# Altium PCB Slave_2_relays.PcbDoc
Units mm, origin at the board's own origin, x right, y up, seen from the top; angles counter-clockwise.
Board outline 89.28 x 72.52 mm, 2 copper layers (Top Layer, Bottom Layer); 42 components, 33 nets, 138 pads, 38 vias.
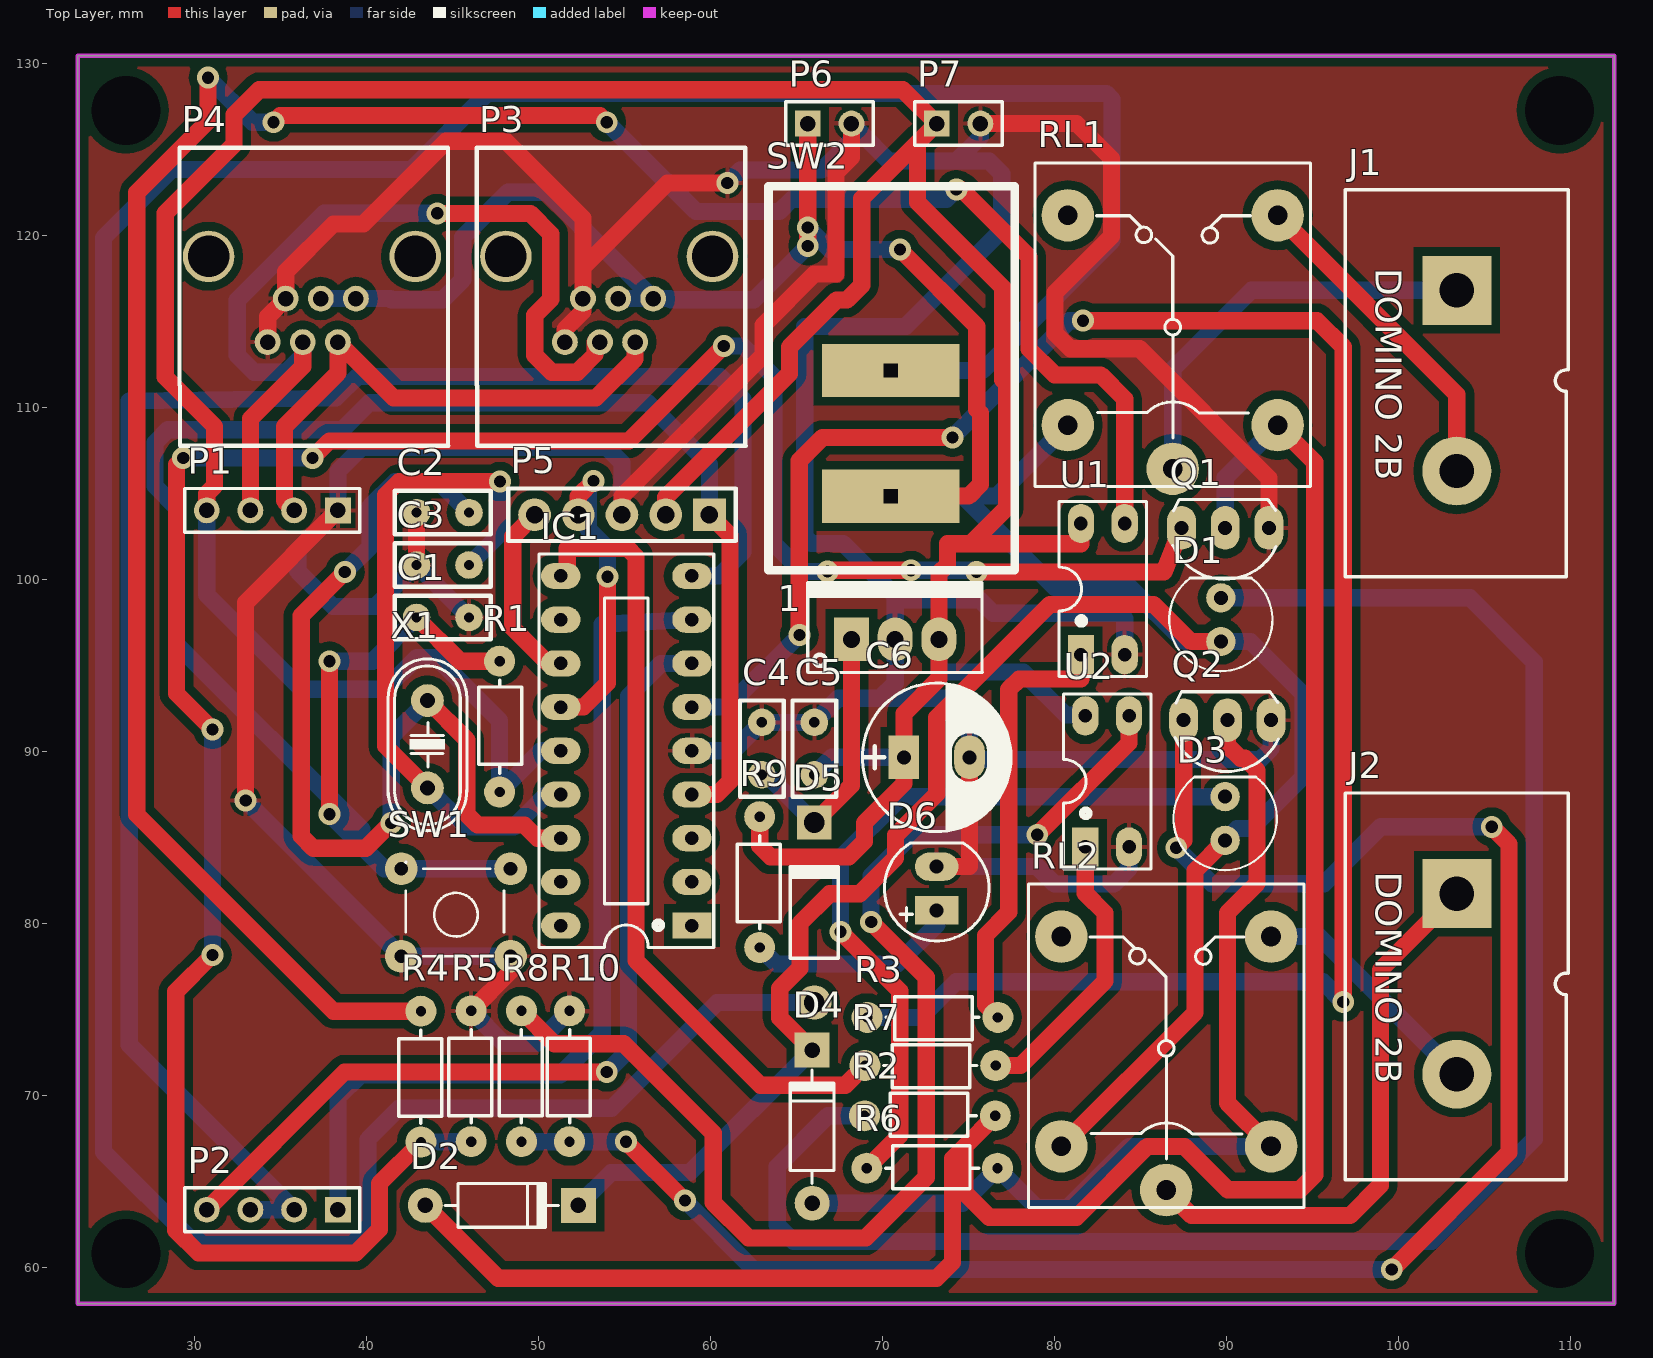
[diagram p0: Top Layer view]
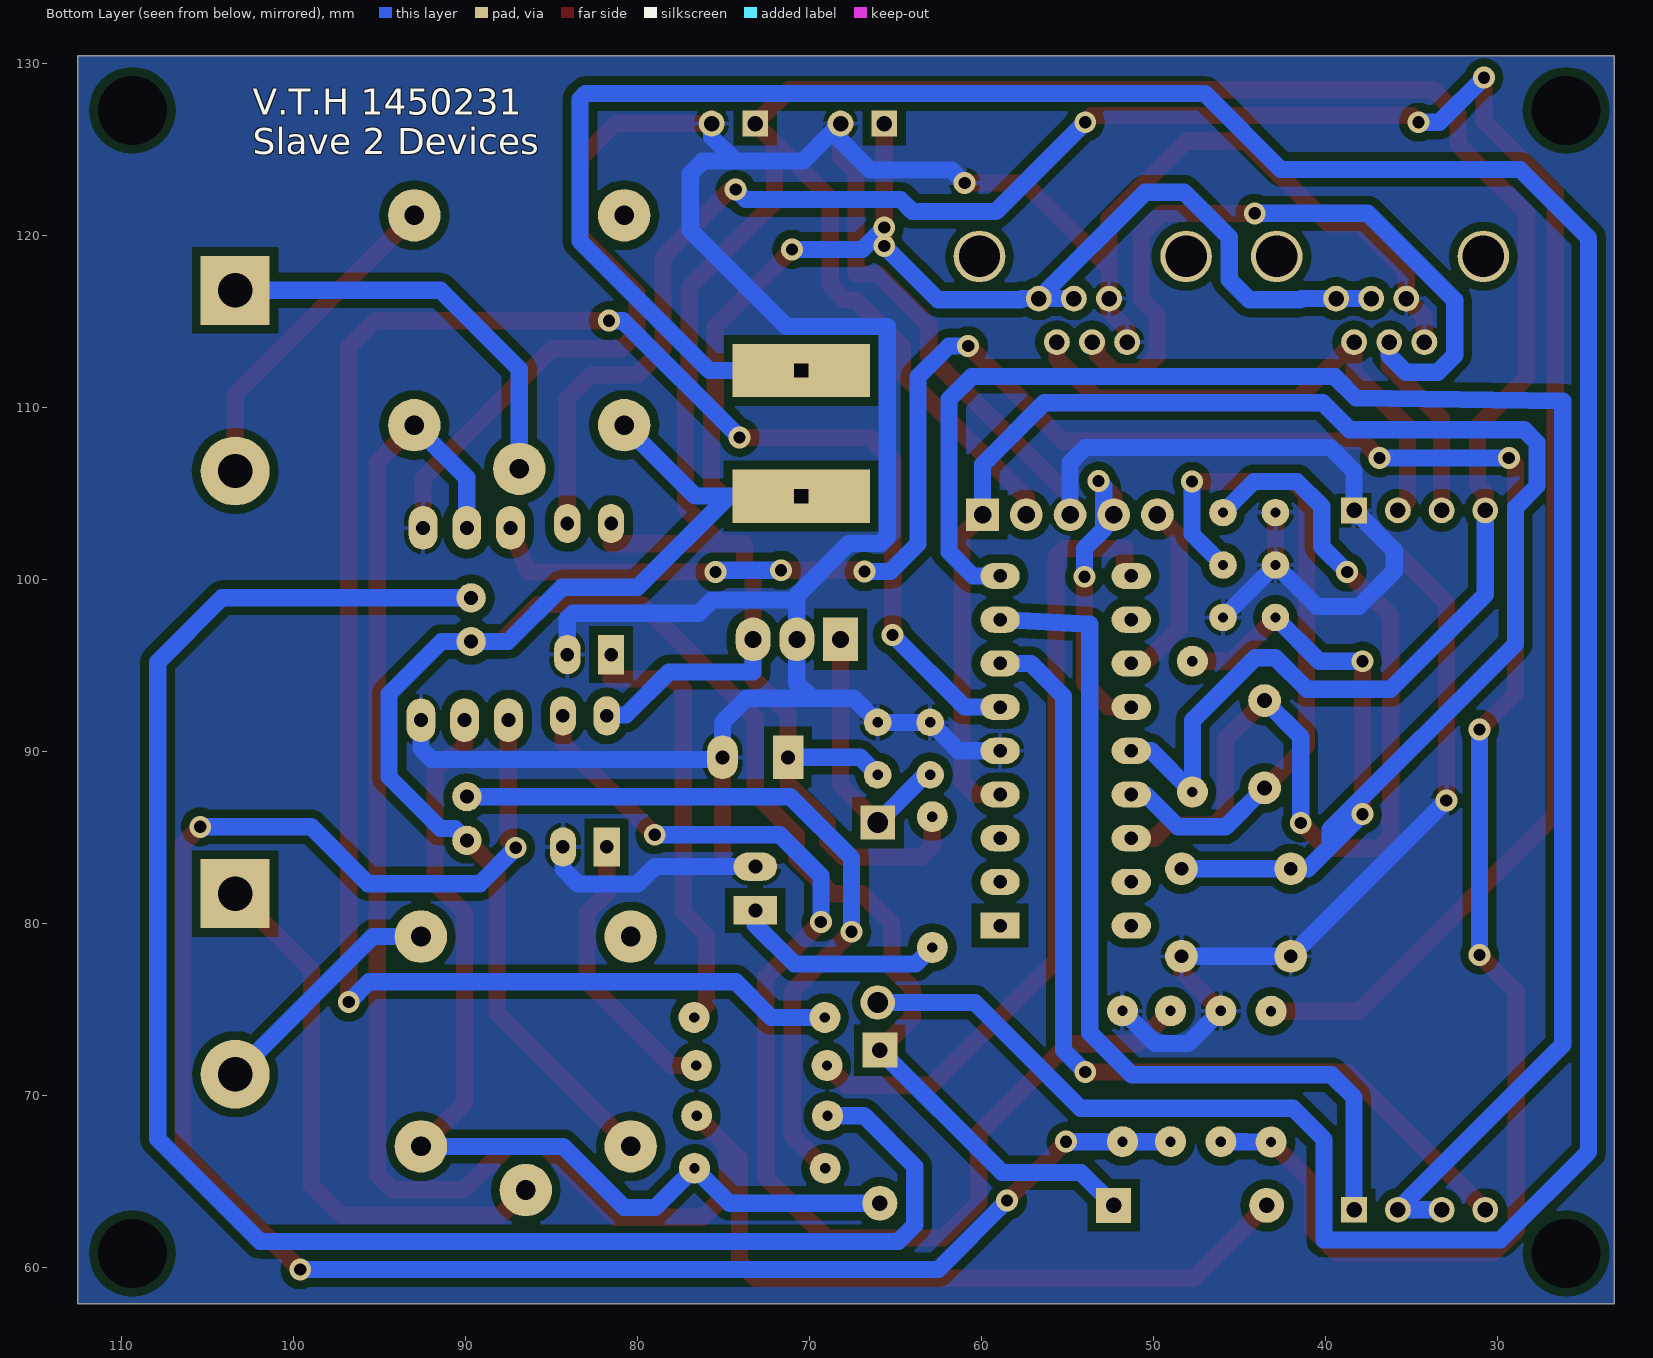
[diagram p1: Bottom Layer view, seen from below]
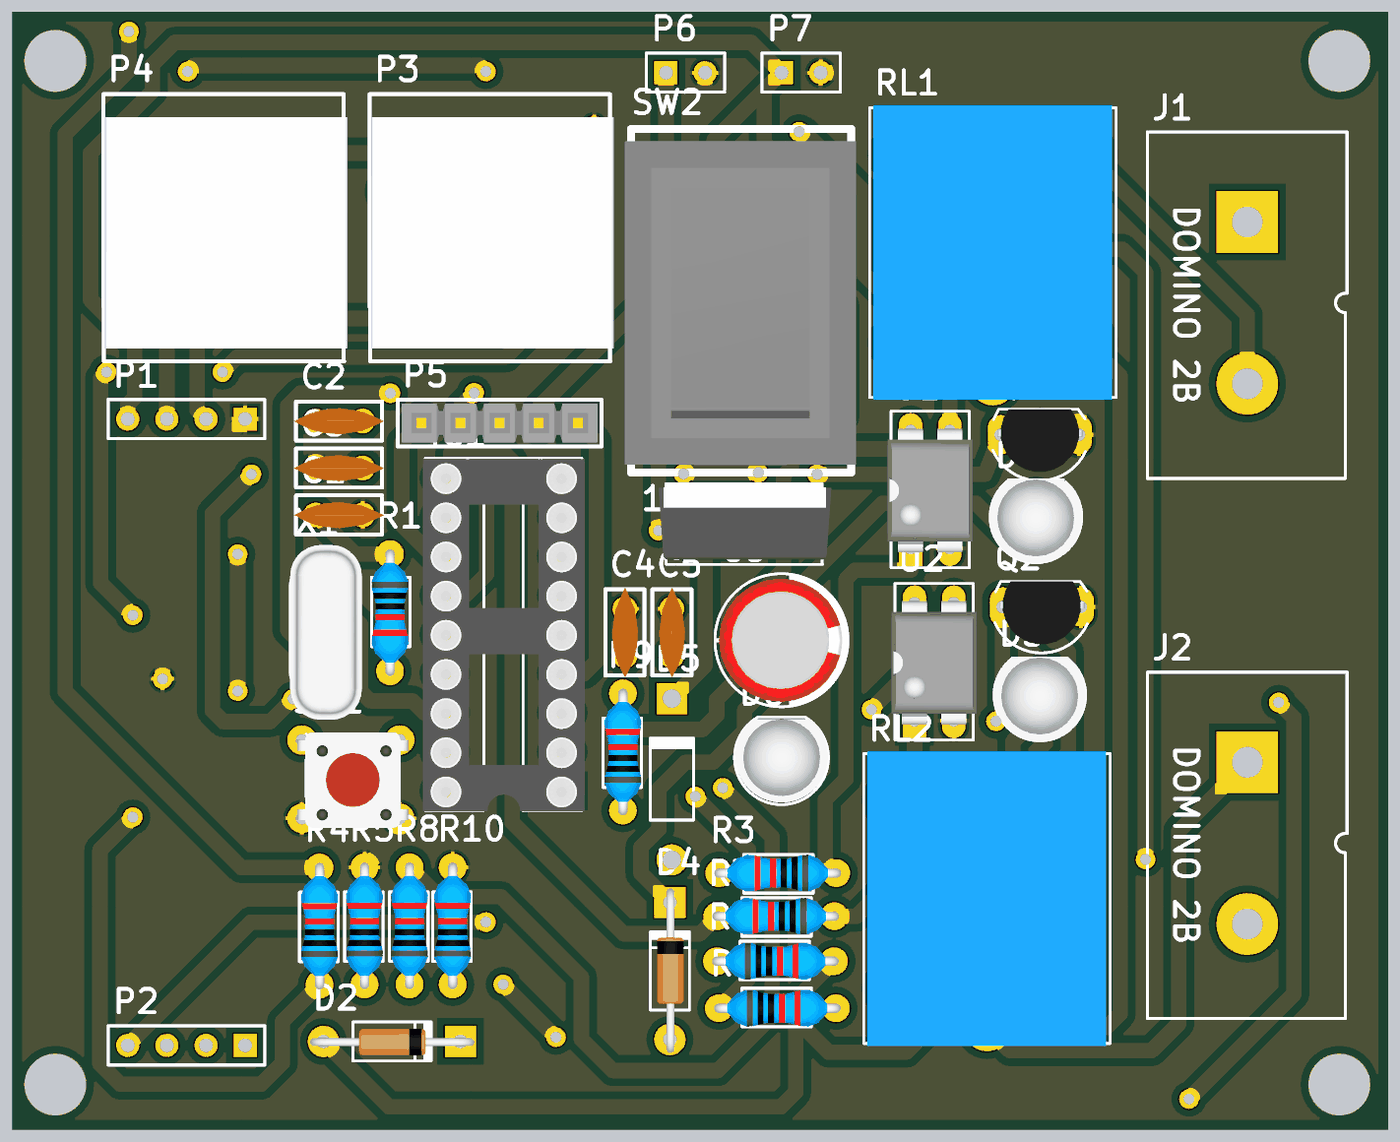
[diagram p2: 3D render of the assembled board from above, using the file's embedded part models]

## Layer stack, top to bottom
Top Solder: solder mask 0.0102, Solder Resist, Dk 3.5
Top Layer: signal copper 0.0356
Dielectric 1: dielectric 0.32, FR-4, Dk 4.8
Bottom Layer: signal copper 0.0356
Bottom Solder: solder mask 0.0102, Solder Resist, Dk 3.5

## Board outline
23.241,57.912 112.522,57.912 112.522,130.429 23.241,130.429

## Design rules (kind name [scope] priority, off if disabled: settings)
Clearance [All] p1: gap=0.5 ignorepadtopadclearanceinfootprint=FALSE
PolygonConnect [All] p1: connectstyle=Relief reliefconductorwidth=0.254 reliefentries=4 polygonreliefangle="90 Angle" airgapwidth=0.254
RoutingVias [All] p1: holewidth=0.711 width=1.27 viastyle="Through Hole" minholewidth=0.711 minwidth=1.27 maxholewidth=0.711 maxwidth=1.27
SolderMaskExpansion [All] p1: expansion=0.102
Width [All] p1: maxlimit=2 minlimit=0.5 preferedwidth=1
30 further rules are at their usual default settings.

## Components (designator, comment, footprint, x,y, rotation, side; value= is the part's Value field where it differs from the comment)
1 "L78M05CP" QTO-220 68.199,96.52 r0 top
C1 "Capacitor Ceramic" "Cap Non-Pol 3mm" 44.45,97.79 r180 top value=100n
C2 "Cap Non-pol" "Cap Non-Pol 3mm" 44.45,103.886 r180 top value=22p
C3 "Cap Non-pol" "Cap Non-Pol 3mm" 44.45,100.838 r180 top value=22p
C4 "Cap Non-pol" "Cap Non-Pol 3mm" 62.992,90.17 r270 top value=100n
C5 "Cap Non-pol" "Cap Non-Pol 3mm" 66.04,90.17 r270 top value=100n
C6 "100uF/16V" CP1.5/3.4 71.247,89.662 r0 top value=100uF/35V/50V
D1 "LED" "LED-0 5mm RED" 89.662,97.663 r180 top
D2 "1N4007" D1A 43.434,63.627 r180 top
D3 "LED" "LED-0 5mm RED" 89.916,86.106 r180 top
D4 "1N4007" D1A 65.913,63.754 r270 top
D5 "Diode 1N4007" DO-41 66.04,80.645 r90 top
D6 "LED" "LED-5mm RED" 73.152,80.772 r90 top
IC1 "PIC16F628A" DIP18/W0.3 58.928,79.883 r90 top
J1 "CON.Domino2" "DOMINO 2B" 103.378,116.799 r270 top
J2 "CON.Domino2" "DOMINO 2B" 103.378,81.747 r270 top
P1 "Header 4" HDR1X4 38.354,104.013 r180 top
P2 "Header 4" HDR1X4 38.354,63.373 r180 top
P3 "Header 8" RJ11 55.626,113.792 r180 top
P4 "Header 8" RJ11 38.354,113.792 r180 top
P5 "Header 5" "Header 5" 59.944,103.759 r180 top
P6 "Header 2" HDR1X2 65.659,126.492 r0 top
P7 "Header 2" HDR1X2 73.152,126.492 r0 top
Q1 "C1815" QTO-92 89.916,102.997 r180 top
Q2 "C1815" QTO-92 90.043,91.821 r180 top
R1 "RES_SMD_0805" "RESISTOR 1/4W" 47.752,95.25 r270 top value=10k
R2 "RES_SMD_0805" "RESISTOR 1/4W" 68.961,68.834 r0 top value=2k2
R3 "RES_SMD_0805" "RESISTOR 1/4W" 76.708,74.549 r180 top value=1k
R4 "RES_SMD_0805" "RESISTOR 1/4W" 43.18,67.31 r90 top value=560
R5 "RES_SMD_0805" "RESISTOR 1/4W" 46.101,67.33 r90 top value=560
R6 "RES_SMD_0805" "RESISTOR 1/4W" 69.088,65.786 r0 top value=2k2
R7 "RES_SMD_0805" "RESISTOR 1/4W" 76.581,71.755 r180 top value=1k
R8 "RES_SMD_0805" "RESISTOR 1/4W" 49.022,67.33 r90 top value=560
R9 "RES_SMD_0805" "RESISTOR 1/4W" 62.865,78.613 r90 top value=1k
R10 "RES_SMD_0805" "RESISTOR 1/4W" 51.816,67.33 r90 top value=560
RL1 "Relay 10A/12V" RL_SPDT_10A 86.868,106.426 r90 top value="Relay SPDT, 10A, 12V"
RL2 "Relay 10A/12V" RL_SPDT_10A 86.487,64.516 r90 top value="Relay SPDT, 10A, 12V"
SW1 "SW7" SW4 48.387,78.105 r180 top value="Button chip 4 pin"
SW2 "SW_BapBenh" SW_Bapbenh 70.585,105.541 r0 top
U1 "TLP521-1" DIP4/W0.3 81.534,95.631 r0 top value=TLP5211
U2 "TLP521-1" DIP4/W0.3 81.788,84.455 r0 top value=TLP5211
X1 "20Mhz" XT2 43.561,90.424 r90 top value=4Mhz

## Footprints (in the part's own frame and the unit in brackets; to place one, negate y for a bottom-side part, rotate by r counter-clockwise, add the part's x,y. Pads: shape width x height; smd on the part's side, far side on the other; paste and mask are expansions set on the pad)
"Cap Non-Pol 3mm" [mm] "Capacitor, Radial; Body 5.6 x 2.5 mm (L x W typ); Pin Spacing 3 mm (typ); Solder Pad 35mil"
  round 1.6 hole 0.6: 1(-1.524,0) 2(1.524,0)
  silkscreen extent -2.79,-1.27 2.79,1.27, body extent -2.92,-0.83 2.92,0.86, height 6.22
CP1.5/3.4 [mil] "Tu hoa 220->470uF,16V, 470uF/16V,25V"
  rect 70x100 hole 32: 1(0,0)
  oval 70x100 hole 32: 2(150,0)
  silkscreen extent -95,-170 245,170, body extent -85,-157 230,157, height 446
D1A [mil] "Diode 1A, W 100mil, L 350mil"
  round 80 hole 35: 1(0,0)
  rect 80x80 hole 35: 2(-350,0)
  silkscreen extent -305,-50 -45,50, body extent -386,-33 34,36, height 84
DIP4/W0.3 [mil] "4 PIN, W 300mil, Pin to pin 100mil"
  rect 60x90 hole 31: 1(0,0)
  oval 60x90 hole 31: 2(100,0) 3(100,300) 4(0,300)
  silkscreen extent -50,-50 150,350, body extent -59,-10 159,305, height 170
DIP18/W0.3 [mil] "18 PIN, W 300mil, Pitch 100mil"
  rect 60x90 hole 31: 1(0,0)
  oval 60x90 hole 31: 2(100,0) 3(200,0) 4(300,0) 5(400,0) 6(500,0) 7(600,0) 8(700,0) 9(800,0) 10(800,300) 11(700,300) 12(600,300) 13(500,300) 14(400,300) 15(300,300) 16(200,300) 17(100,300) 18(0,300)
  silkscreen extent -50,-50 850,350, body extent -51,-57 849,356, height 119
DO-41 [mm] "Diode, Axial; Body 5.2 x 2.7 mm (LxDia. max), Lead Dia. 0.86 mm (max)"
  round 2 hole 1.2: 1(-5.23,0)
  rect 2x2 hole 1.2: 2(5.23,0)
  silkscreen extent -2.65,-1.4 2.75,1.4
"DOMINO 2B" [mm]
  rect 4x4 hole 2: 1(0,0)
  round 4 hole 2: 2(10.5,0)
  silkscreen extent -5.84,-6.48 16.64,6.48
HDR1X2 [mm] "Connector; Header; 2 Position"
  rect 1.5x1.5 hole 0.9: 1(0,0)
  round 1.5 hole 0.9: 2(2.54,0)
  silkscreen extent -1.27,-1.27 3.81,1.27
HDR1X4 [mm] "Connector; Header; 4 Position"
  rect 1.5x1.5 hole 0.9: 1(0,0)
  round 1.5 hole 0.9: 2(2.54,0) 3(5.08,0) 4(7.62,0)
  silkscreen extent -1.27,-1.27 8.89,1.27
"Header 5" [mil] "Connector; Header; 5 Position; Solder Pad 35mil"
  rect 75x75 hole 40: 1(0,0)
  round 75 hole 40: 2(100,0) 3(200,0) 4(300,0) 5(400,0)
  silkscreen extent -60,-60 460,60, body extent -50,-50 450,50, height 83
"LED-0 5mm RED" [mil] "Typical LED; RED; 2 Leads; Solder Pad 35mil"
  round 67 hole 32: 1(0,50) 2(0,-50)
  silkscreen extent -118,-96 118,118, body extent -118,-96 119,117, height 345
"LED-5mm RED" [mil] "LED-5mm RED"
  rect 65x100 hole 32: 1(0,0)
  oval 65x100 hole 32: 2(100,0)
  silkscreen extent -70,-120 154,120, body extent -65,-119 149,118, height 339
QTO-92 [mil] "TO-92"
  oval 66x100 hole 32: 1(-100,0) 2(0,0) 3(100,0)
  silkscreen extent -117,-65 120,118, body extent -109,-66 109,95, height 245
QTO-220 [mil] "TO-220 - 1-2-3"
  rect 80x100 hole 39: 1(0,0)
  oval 80x100 hole 39: 2(100,0) 3(200,0)
  silkscreen extent -100,-76 300,130, body extent -119,-64 322,121, height 755
"RESISTOR 1/4W" [mm] "P=0.25W, PITCH = 7.6 mm"
  round 1.8 hole 0.6: 1(0,0) 2(7.6,0)
  silkscreen extent 1.1,-1.2 6.5,1.3, body extent -0.31,-1.2 7.91,1.2, height 2.7
RJ11 [mm] "DIP 20, 20 PIN, W 300mil, Pin to pin 100mil"
  round 1.5 hole 0.9: 1(0,0) 2(2.04,0) 3(4.08,0) 4(-1.05,-2.53) 5(0.99,-2.53) 6(3.03,-2.53)
  round 3 hole 2.4: 7(-4.5,-4.98) 8(7.51,-4.98)
  silkscreen extent -6.43,-11.3 9.2,6.03, body extent -6.71,-9.8 9.11,5.19, height 12.87
RL_SPDT_10A [mil] "Relay SPDT, 5 pin, 10A,W 650mil, L 800mil, H 800mil"
  round 120 hole 45: 1(0,0) 2(580,240) 3(580,-240) 4(100,-240) 5(100,240)
  silkscreen extent -40,-315 700,315, body extent -46,-304 706,306, height 602
SW4 [mil] "SW button 4pin, 250 x250 mil"
  round 75 hole 31: 1(0,0) 2(250,-200) 3(250,0) 4(0,-200)
  silkscreen extent 15,-215 240,0, body extent -36,-220 276,24, height 276
SW_Bapbenh [mm] "Typical LED; GREEN; RED; 2 Leads; Solder Pad 35mil"
  rect 8x3.1 hole 0.8 square: 1(-0.1,-0.7) 2(-0.1,6.6)
  silkscreen extent -7.2,-5 7.1,17.3, body extent -7.6,-4.55 7.4,16.55, height 16.72
XT2 [mil] "Footpin for Crystal 2 pin"
  round 75 hole 34: 1(-100,0) 2(100,0)
  silkscreen extent -198,-90 195,90, body extent -233,-93 213,90, height 138

## Part data
1: "Positive Voltage Regulator", ComponentLink1Description="Manufacturer Link", ComponentLink1URL=http://www.st.com/, ComponentLink2Description=Datasheet, ComponentLink2URL=http://www.st.com/stonline/products/literature/ds/2146/l78m05c.pdf, DatasheetVersion=Apr-1994, LatestRevisionDate=17-Jul-2002, LatestRevisionNote="Re-released for DXP Platform.", Note="Tab is connected to pin 3 (GND).", PackageDescription="TO, Thru-Hole, Vertical, Heatsink Mounted; 3 In-Line Leads; Pitch 2.54 mm; Pin sequence 1, 3, 2", PackageReference=ISOWATT220AB, PackageVersion=Jul-1998, Published=24-Aug-2001, Publisher="Altium Limited"
C1: library part CapSMD, "Capacitor", LatestRevisionDate=17-Jul-2002, LatestRevisionNote="Re-released for DXP Platform.", PackageReference=RAD-0.3, Published=8-Jun-2000, Publisher="Altium Limited"
C2 C3 C4 C5: "Non-polarized Capacitor", LatestRevisionDate=17-Jul-2002, LatestRevisionNote="Re-released for DXP Platform.", PackageReference=RAD-0.3, Published=8-Jun-2000, Publisher="Altium Limited"
C6: library part CP3, "Cap 100uF/35V - 470uF/16V", Description 1="1000uF/6,3V - 470uF/16V - 330uF - 25V", Description 2="220uF/35V - 100uF/50V - 63V - 4,7uF/200V", Description 3="22uF => 33uF100V - 3,3uF => 4,7uF/250V", Description 4="2,2uF =>3,3uF/350 - 2,2uF/400V - 1uF/450V"
D1 D3 D6: "Typical LED", LatestRevisionDate=08-Jul-2005, LatestRevisionNote="Mech Layer 1 removed.", PackageReference=LED-1, Published=8-Jun-2000, Publisher="Altium Limited"
D2 D4: library part D1A, "Diode 1A"
D5: "1 Amp General Purpose Rectifier", Code_JEDEC=DO-204-AL, ComponentLink1Description="Manufacturer Link", ComponentLink1URL=http://www.fairchildsemi.com/, ComponentLink2Description=Datasheet, ComponentLink2URL=http://www.fairchildsemi.com/ds/1N%2F1N4001.pdf, DatasheetVersion=1998, LatestRevisionDate=17-Jul-2002, LatestRevisionNote="Re-released for DXP Platform.", PackageDescription="Diode, Axial; Body 5.2 x 2.7 mm (LxDia. max), Lead Dia. 0.86 mm (max)", PackageReference=DO-41, PackageVersion=Aug-1999, Published=8-Jun-2000, Publisher="Altium Limited"
J1 J2: "2 pins Domino Header", ComponentLink1Description="Digikey Part link", ComponentLink2Description="Open DataSheet", ComponentLink2URL=H:\LIBRARY\LIBRARY.Datasheet\, Price=2000VND, Publisher="Hoang Nguyen"
P1 P2: "Header, 4-Pin", LatestRevisionDate=17-Jul-2002, LatestRevisionNote="Re-released for DXP Platform.", Publisher="Altium Limited"
P3 P4: "Header, 8-Pin", LatestRevisionDate=17-Jul-2002, LatestRevisionNote="Re-released for DXP Platform.", Publisher="Altium Limited"
P5: "Header, 5-Pin", LatestRevisionDate=17-Jul-2002, LatestRevisionNote="Re-released for DXP Platform.", Publisher="Altium Limited"
P6 P7: "Header, 2-Pin", LatestRevisionDate=17-Jul-2002, LatestRevisionNote="Re-released for DXP Platform.", Publisher="Altium Limited"
Q1 Q2: "NPN 600mW, ECB", =C2383
R1 R2 R3 R4 R5 R6 R7 R8 R9 R10: "RES_0805", LatestRevisionDate=17-Jul-2002, LatestRevisionNote="Re-released for DXP Platform.", PackageReference=AXIAL-0.4, Published=8-Jun-2000, Publisher="Altium Limited"
RL1 RL2: library part "Relay 1", "Relay SPDT,10A - 12VDC 5 Pin", ="Relay SPDT, 10A, 24V"
SW1: library part SW4, "Switch button 4 pin"
U1 U2: "Single Opto"
X1: library part XT2, "Crystal For all Crystal 2pin."

## Free pads (board coordinates)
  round 1.524 hole 4: 10(26.035,60.833) 10(26.035,127.254) 10(109.347,60.833) 10(109.347,127.254)

## Via types
v1: diameter 1.27, hole 0.711, Top Layer to Bottom Layer, 38 vias

## Nets (pads, with @x,y where several pads share a name; then routed paths per layer and width w, separated by ;. In a path a pad name is that pad's centre, name@x,y a point inside that pad or via, vN(x,y) a via of type N, cw(c..) or ccw(c..) an arc to the next point about the centre after c; other vN are vias at no path point)
12V: D1.1 D2.2 D3.1 D4.2 P3.4 P3.5 P4.4 P4.5 P6.1 RL1.5 RL2.5 SW2.1 | length 203.8
  Top Layer w1: v1(65.659,119.38) v1(65.659,120.447) P6.1 ; D4.2 64.033,74.524 64.033,76.237 65.202,77.405 65.202,80.01 66.929,81.737 68.682,81.737 70.764,83.82 70.764,85.141 73.152,87.528 73.152,91.973 79.731,98.552 85.75,98.552 87.909,96.393 D1.1 ; SW2.1 75.006,104.841 75.701,105.536 75.701,109.664 75.485,109.88 75.485,114.706 v1(71.015,119.177) ; RL2.5 88.17,74.835 88.17,83.09 D3.1
  Bottom Layer w1: P4.5 P4.4 41.412,116.322 41.478,116.256 44.45,116.256 45.616,117.422 45.616,119.886 48.235,122.504 50.494,122.504 P3.4 ; D2.2 54.238,65.541 58.81,65.541 D4.2 ; P3.5 P3.4 ; v1(65.659,119.38) 62.535,116.256 57.709,116.256 57.643,116.322 P3.4 ; v1(65.659,120.447) 66.929,119.177 v1(71.015,119.177) ; SW2.1 74.696,104.841 ; RL1.5 76.647,104.841 74.696,104.841 ; D3.1 90.602,85.522 91.44,85.522 94.437,88.519 94.437,93.345 91.389,96.393 D1.1 87.527,96.393 84.379,99.541 79.996,99.541 74.696,104.841
A: P1.2 P3.1 P4.1 | length 31.8
  Top Layer w1: P1.2 35.246,104.581 35.246,108.882 38.354,111.99 P4.1 41.605,110.541 53.34,110.541 55.626,112.827 P3.1
B: P1.3 P3.2 P4.2 | length 53.2
  Top Layer w1: P1.3 33.274,109.332 36.314,112.372 P4.2 ; v1(44.129,121.272) 49.53,121.272 50.724,120.078 50.724,116.281 49.796,115.353 49.796,113.03 50.784,112.042 52.271,112.042 53.296,113.067 53.296,113.792 P3.2
  Bottom Layer w1: P4.2 36.314,113.005 35.351,112.042 33.5,112.042 32.512,113.03 32.512,116.23 37.567,121.285 44.116,121.285 v1(44.129,121.272)
GND: 1.2 C1.1 C2.2 C3.2 C4.1 C5.1 C6.2 D6.2 IC1.5 P1.1 P3.3 P3.6 P4.3 P4.6 P5.3 P6.2 P7.2 Q1.1 Q2.1 R5.2 R10.2 SW1.1 SW1.3 U1.2 U2.2 | length 346.5
  Top Layer w1: v1(32.995,87.147) 32.995,98.654 P1.1 ; P4.3 34.274,115.272 P4.6 35.324,117.874 38.1,120.65 39.834,120.65 44.644,125.46 48.124,125.46 52.596,120.988 52.596,118.128 ; C3.2 C2.2 ; R5.2 48.387,77.216 SW1.1 ; P3.3 51.546,114.529 52.596,115.579 P3.6 52.596,118.128 ; P5.3 54.864,104.826 63.068,113.03 63.068,114.773 66.04,117.745 67.294,117.745 67.294,123.634 68.199,124.539 P6.2 ; v1(60.985,123.038) 57.506,123.038 52.596,118.128 ; D6.2 75.057,83.312 C6.2 ; P7.2 81.28,126.492 83.312,124.46 83.312,119.948 80.026,116.662 80.026,114.3 80.924,113.402 84.947,113.402 92.456,105.893 Q1.1
  Bottom Layer w1: v1(32.995,87.147) SW1.3 SW1.1 ; C1.1 C3.2 40.513,98.425 38.075,98.425 36.017,100.482 36.017,101.676 P1.1 38.354,106.274 39.751,107.671 53.975,107.671 54.864,106.782 P5.3 ; R5.2 48.006,73.025 49.911,73.025 R10.2 ; IC1.5 61.341,90.043 C4.1 C5.1 67.437,93.091 69.85,93.091 ; v1(60.985,123.038) 61.733,123.785 66.457,123.785 P6.2@68.682,126.009 ; P6.2 P6.2@68.682,126.009 ; D6.2 78.994,83.312 80.01,82.296 83.439,82.296 84.328,83.185 U2.2 ; P7.2 75.692,125.705 74.295,124.308 ; U1.2 84.074,97.714 83.747,98.041 76.437,98.041 75.682,98.797 70.739,98.797 ; Q2.1 92.583,90.17 91.948,89.535 75.057,89.535 C6.2 75.057,91.694 73.66,93.091 69.85,93.091 ; P6.2@68.682,126.009 70.383,124.308 74.295,124.308 ; 69.85,93.091 70.739,93.98 1.2 70.739,98.797 ; 70.739,98.797 70.739,99.06 67.703,102.096 65.875,102.096 65.481,102.489 65.481,114.706 71.349,114.706 76.937,120.294 76.937,123.571 76.2,124.308 74.295,124.308
MCLR: C1.2 IC1.4 P5.1 R1.1 SW1.2 SW1.4 | length 117.2
  Top Layer w1: v1(37.871,86.36) v1(37.871,95.25) ; C1.2 45.466,95.25 R1.1 ; IC1.4 60.376,87.503 61.138,88.265 61.138,102.565 P5.1
  Bottom Layer w1: v1(37.871,86.36) 39.742,84.489 ; v1(37.871,95.25) 40.386,95.25 C1.2 ; SW1.4 SW1.2 41.046,83.185 39.742,84.489 ; P5.1 59.944,106.68 56.363,110.261 40.179,110.261 38.613,108.696 28.473,108.696 27.727,107.95 27.727,105.426 28.981,104.172 28.981,96.241 39.742,85.48 39.742,84.489
Net1_1: 1.1 C4.2 D5.2 | length 15.7
  Top Layer w1: D5.2 68.199,88.034 1.1
  Bottom Layer w1: C4.2 63.269,88.646 D5.2
NetD1_2: D1.2 R2.1 | length 104
  Bottom Layer w1: R2.1 66.827,68.834 63.881,65.888 63.881,62.484 64.837,61.528 101.926,61.528 107.878,67.48 107.878,95.195 104.14,98.933 D1.2
NetD2_1: D2.1 Q1.2 R2.2 RL1.4 | length 120.7
  Top Layer w1: D2.1 47.671,59.39 73.136,59.39 74.071,60.325 74.071,66.344 74.778,67.051 ; R2.2 74.778,67.051 ; RL1.4 95.123,106.807 95.123,65.405 94.25,64.532 90.068,64.532 87.544,67.056 85.395,67.056 81.28,62.941 76.2,62.941 74.778,64.364 74.778,67.051
  Bottom Layer w1: Q1.2 89.916,105.918 RL1.4
NetD3_2: D3.2 R6.1 | length 44.1
  Top Layer w1: v1(67.564,79.527) 71.009,76.082 71.009,67.707 R6.1
  Bottom Layer w1: v1(67.564,79.527) 67.564,83.82 71.12,87.376 D3.2
NetD4_1: D4.1 Q2.2 R6.2 RL2.4 | length 57.3
  Top Layer w1: Q2.2 90.043,90.373 90.805,89.611 91.059,89.611 91.77,88.9 91.77,82.347 90.043,80.62 90.043,69.596 RL2.4
  Bottom Layer w1: D4.1 74.656,63.754 R6.2 78.974,63.5 80.772,63.5 84.328,67.056 RL2.4
NetD5_1: D5.1 SW2.2 | length 192.1
  Bottom Layer w1: D5.1 60.402,75.415 54.252,69.266 41.91,69.266 40.107,67.462 40.107,61.62 29.845,61.62 24.727,66.738 24.727,119.841 28.711,123.825 42.616,123.825 47.036,128.245 82.999,128.245 83.337,127.906 83.337,119.659 75.819,112.141 SW2.2
NetD6_1: D6.1 R9.1 | length 12.5
  Bottom Layer w1: R9.1 63.83,77.648 70.866,77.648 73.152,79.934 D6.1
NetJ1_1: J1.1 RL1.1 | length 24.2
  Bottom Layer w1: RL1.1 86.868,112.227 91.44,116.799 J1.1
NetJ1_2: J1.2 RL1.3 | length 19.2
  Top Layer w1: RL1.3 103.378,110.744 J1.2
NetJ2_1: J2.1 RL2.1 | length 32.6
  Top Layer w1: RL2.1 87.971,63.032 97.172,63.032 98.933,64.793 98.933,77.302 J2.1
NetJ2_2: J2.2 RL2.3 | length 14.1
  Bottom Layer w1: RL2.3 95.377,79.248 J2.2
NetQ1_3: Q1.3 R4.1 R5.1 | length 142.4
  Top Layer w1: v1(29.362,107.061) 28.981,106.68 28.981,93.368 v1(31.064,91.285) ; v1(31.064,78.181) 28.931,76.048 28.931,62.18 30.252,60.858 39.395,60.858 40.767,62.23 40.767,64.897 R4.1 ; v1(36.881,107.061) 37.862,108.042 55.261,108.042 v1(60.782,113.563) ; v1(66.802,100.457) 66.878,100.533 v1(71.653,100.533) ; v1(75.463,100.432) 86.36,100.432 Q1.3
  Bottom Layer w1: v1(29.362,107.061) v1(36.881,107.061) ; v1(31.064,78.181) v1(31.064,91.285) ; R4.1 44.628,67.31 44.648,67.33 R5.1 ; v1(60.782,113.563) 61.9,113.563 63.703,111.76 63.703,102.057 65.303,100.457 v1(66.802,100.457) ; v1(71.653,100.533) 75.362,100.533 v1(75.463,100.432)
NetQ2_3: Q2.3 R8.1 R10.1 | length 110.8
  Top Layer w1: v1(55.098,67.33) v1(58.522,63.906) ; v1(87.071,84.404) 87.503,84.836 Q2.3 ; v1(99.593,59.893) 106.401,66.7 106.401,84.633 v1(105.41,85.623)
  Bottom Layer w1: R8.1 R10.1 v1(55.098,67.33) ; v1(58.522,63.906) 62.535,59.893 v1(99.593,59.893) ; v1(87.071,84.404) 89.154,82.321 95.656,82.321 98.958,85.623 v1(105.41,85.623)
NetR3_1: R3.1 U1.1 | length 25.8
  Top Layer w1: R3.1 75.984,75.273 75.984,79.314 77.343,80.673 77.343,93.61 77.941,94.209 81.534,94.209 U1.1
NetR4_2: R4.2 U1.3 | length 138.5
  Top Layer w1: v1(30.81,129.159) 30.81,126.618 26.67,122.477 26.67,86.34 38.1,74.91 R4.2 ; v1(34.62,126.568) 35.012,126.96 53.583,126.96 v1(53.975,126.568) ; v1(74.295,122.657) 74.6,122.657 78.511,118.745 78.511,113.386 80.01,111.887 82.677,111.887 84.074,110.49 U1.3
  Bottom Layer w1: v1(30.81,129.159) 33.401,126.568 v1(34.62,126.568) ; v1(53.975,126.568) 59.157,121.387 64.024,121.387 64.719,122.082 73.72,122.082 v1(74.295,122.657)
NetR7_1: R7.1 U2.1 | length 16.7
  Top Layer w1: R7.1 78.029,71.755 82.931,76.657 82.931,80.62 81.788,81.763 U2.1
NetR8_2: R8.2 U2.3 | length 71.4
  Top Layer w1: R8.2 50.935,73.017 54.966,73.017 60.166,67.816 60.166,63.786 62.214,61.738 69.028,61.738 72.542,65.253 72.542,76.886 v1(69.342,80.086) ; v1(78.994,85.166) 84.328,90.5 U2.3
  Bottom Layer w1: v1(69.342,80.086) 69.342,82.78 71.728,85.166 v1(78.994,85.166)
PGC: IC1.12 P5.5 | length 10.8
  Top Layer w1: P5.5 48.514,102.489 48.514,97.175 50.566,95.123 IC1.12
PGD: IC1.13 P5.4 | length 17.9
  Top Layer w1: IC1.13 52.629,92.583 54.026,93.98 v1(54.026,100.152) ; P5.4 52.324,104.826 v1(53.213,105.715)
  Bottom Layer w1: v1(53.213,105.715) 52.908,105.41 52.908,102.921 54.026,101.803 v1(54.026,100.152)
RELAY1: IC1.6 R3.2 | length 120.8
  Top Layer w1: v1(65.176,96.774) 65.167,96.783 65.167,106.899 66.523,108.255 v1(74.066,108.255) ; v1(81.661,115.037) 95.25,115.037 96.774,113.513 v1(96.774,75.438)
  Bottom Layer w1: IC1.6 60.985,92.583 v1(65.176,96.774) ; R3.2 72.22,74.549 74.288,76.617 95.595,76.617 v1(96.774,75.438) ; v1(74.066,108.255) 80.848,115.037 v1(81.661,115.037)
RELAY2: IC1.10 R7.2 | length 46.4
  Top Layer w1: IC1.10 51.689,100.203 51.689,101.803 55.194,101.803 55.677,101.321 55.677,77.85 62.915,70.612 67.838,70.612 R7.2
RELAY3: IC1.11
RXD: IC1.7 P2.4 | length 53.4
  Top Layer w1: P2.4 38.735,71.374 v1(53.975,71.374)
  Bottom Layer w1: v1(53.975,71.374) 55.245,72.644 55.245,93.218 57.15,95.123 IC1.7
SEC: IC1.9 P2.2 P2.3 | length 102.7
  Bottom Layer w1: P2.3 P2.2 26.227,72.96 26.227,110.367 38.241,110.542 39.484,111.785 60.579,111.785 61.9,110.465 61.9,101.6 60.503,100.203 IC1.9
TXD: IC1.8 P2.1 | length 52.4
  Bottom Layer w1: P2.1 38.354,69.901 39.675,71.222 51.283,71.222 53.721,73.66 53.721,97.4 IC1.8
VCC: 1.3 C5.2 C6.1 IC1.14 P1.4 P5.2 P7.1 R1.2 R9.2 U1.4 U2.4 | length 213.1
  Top Layer w1: P1.4 30.734,104.978 31.191,105.435 31.191,108.89 28.321,111.76 28.321,121.285 32.325,125.289 32.325,127 33.785,128.46 71.184,128.46 P7.1 72.034,125.374 ; P5.2 57.404,104.77 64.592,111.958 64.592,113.487 67.35,116.245 67.945,116.245 68.794,117.094 68.794,122.134 72.034,125.374 ; R9.2 62.865,84.506 63.5,83.871 68.047,83.871 68.951,84.775 68.951,85.844 71.247,88.14 C6.1 71.247,92.202 73.279,94.234 1.3 73.279,100.355 73.782,100.858 73.782,102.076 75.137,102.076 ; U1.4 81.534,102.076 75.137,102.076 ; 72.034,125.374 72.034,121.92 76.985,116.969 76.985,111.606 77.201,111.39 77.201,104.14 75.137,102.076
  Bottom Layer w1: P1.4 30.734,99.117 36.236,93.615 41.095,93.615 42.933,95.453 44.094,95.453 47.752,91.796 R1.2 50.145,90.043 IC1.14 ; C5.2 67.056,89.662 C6.1 ; 1.3 73.279,94.615 78.181,94.615 80.67,92.126 81.788,92.126 U2.4
XT1: C2.1 IC1.16 X1.2 | length 55.6
  Top Layer w1: v1(38.76,100.432) 36.22,97.892 36.22,85.09 36.932,84.379 39.98,84.379 v1(41.453,85.852) ; X1.2 45.847,90.678 45.847,86.36 46.482,85.725 49.2,85.725 49.962,84.963 IC1.16
  Bottom Layer w1: v1(38.76,100.432) 40.237,101.908 40.237,104.245 41.681,105.689 44.171,105.689 C2.1 ; v1(41.453,85.852) 41.453,90.856 X1.2
XT2: C3.1 IC1.15 X1.1 | length 40.1
  Top Layer w1: X1.1 41.123,90.322 41.123,104.902 41.91,105.689 v1(47.777,105.689)
  Bottom Layer w1: X1.1 45.822,85.623 48.59,85.623 50.47,87.503 IC1.15 ; C3.1 47.777,102.641 v1(47.777,105.689)
pads on no net: IC1.1 IC1.2 IC1.3 IC1.17 IC1.18 P3.7 P3.8 P4.7 P4.8 RL1.2 RL2.2

## Polygon pours and split planes (outlines as drawn)
GND on Top Layer "top" (solid, pour order 4): 23.495,130.429 112.268,130.429 112.522,130.175 112.522,57.912 23.241,57.912
GND on Bottom Layer "bot" (solid, pour order 6): 23.241,130.429 112.522,130.429 112.522,57.912 23.241,57.912

## Keep-outs
Top Layer:
  lines w0.254: 23.241,57.912 112.522,57.912 112.522,130.429 23.495,130.429 23.241,130.429 23.241,57.912

## Silkscreen, mask and mechanical layers (free items; w line width, h text height)
Bottom Overlay:
  text "V.T.H 1450231 / Slave 2 Devices" at 102.362,124.714 h1.52

## Text inside footprints (layer, text, board x,y; h text height)
J1: Top Overlay "DOMINO 2B" at 98.679,118.069 h1.52 r270
J2: Top Overlay "DOMINO 2B" at 98.679,83.017 h1.52 r270